# Altium PCB GPSpart.PcbDoc
Units mm, origin at the board's own origin, x right, y up, seen from the top; angles counter-clockwise.
Board outline 40.25 x 18.25 mm, 2 copper layers (Top Layer, Bottom Layer), stack 1.571 mm thick; 14 components, 10 nets, 53 pads, 39 vias.
Unrouted connection lines stored in the file: 15.
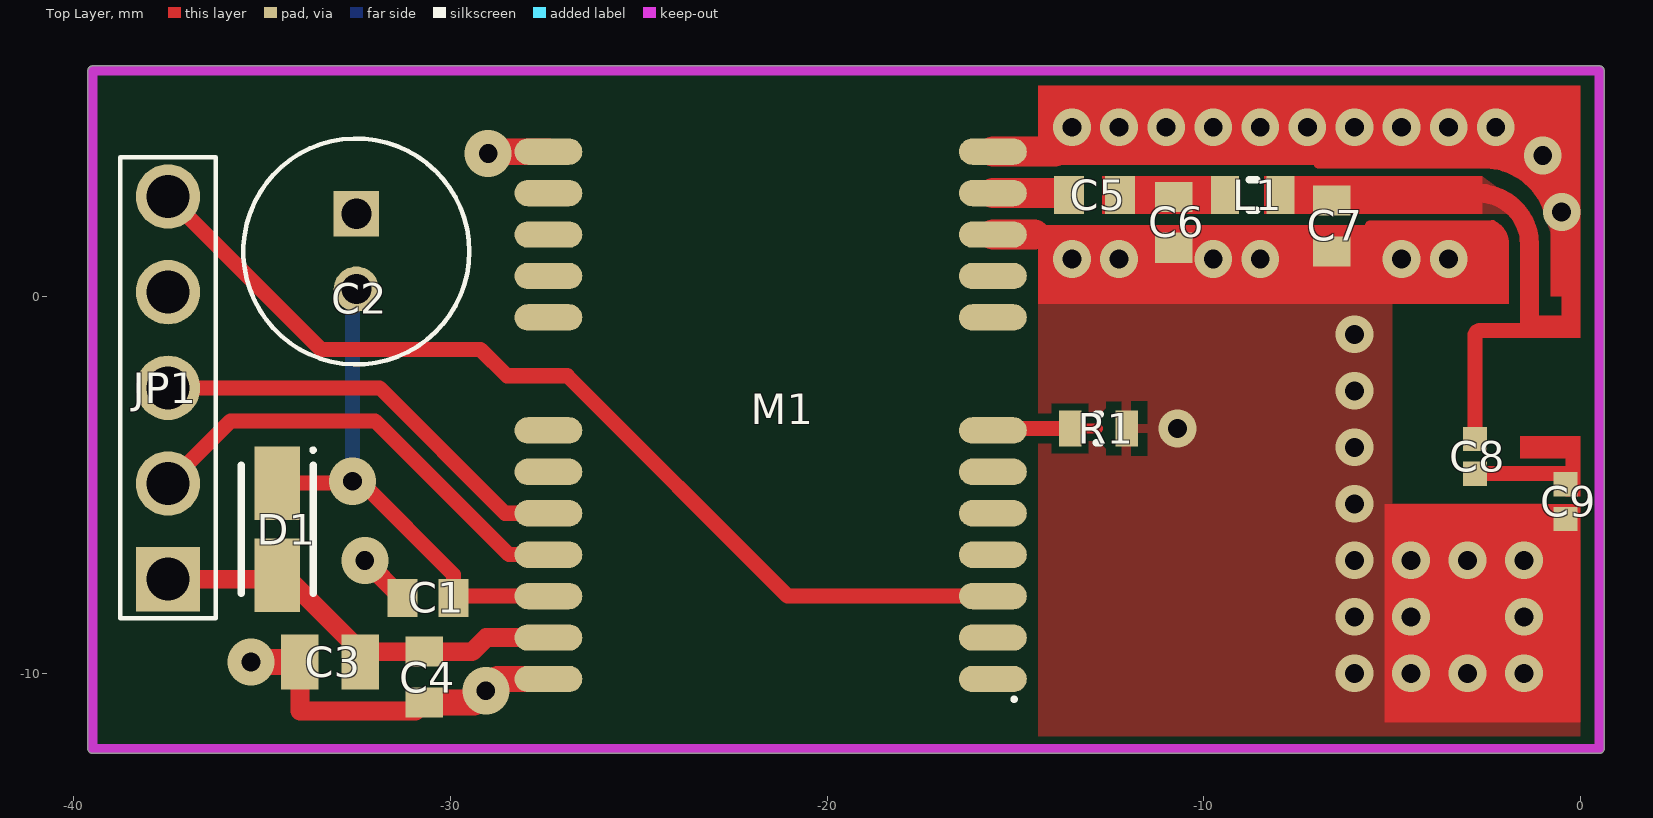
[diagram p0: Top Layer view]
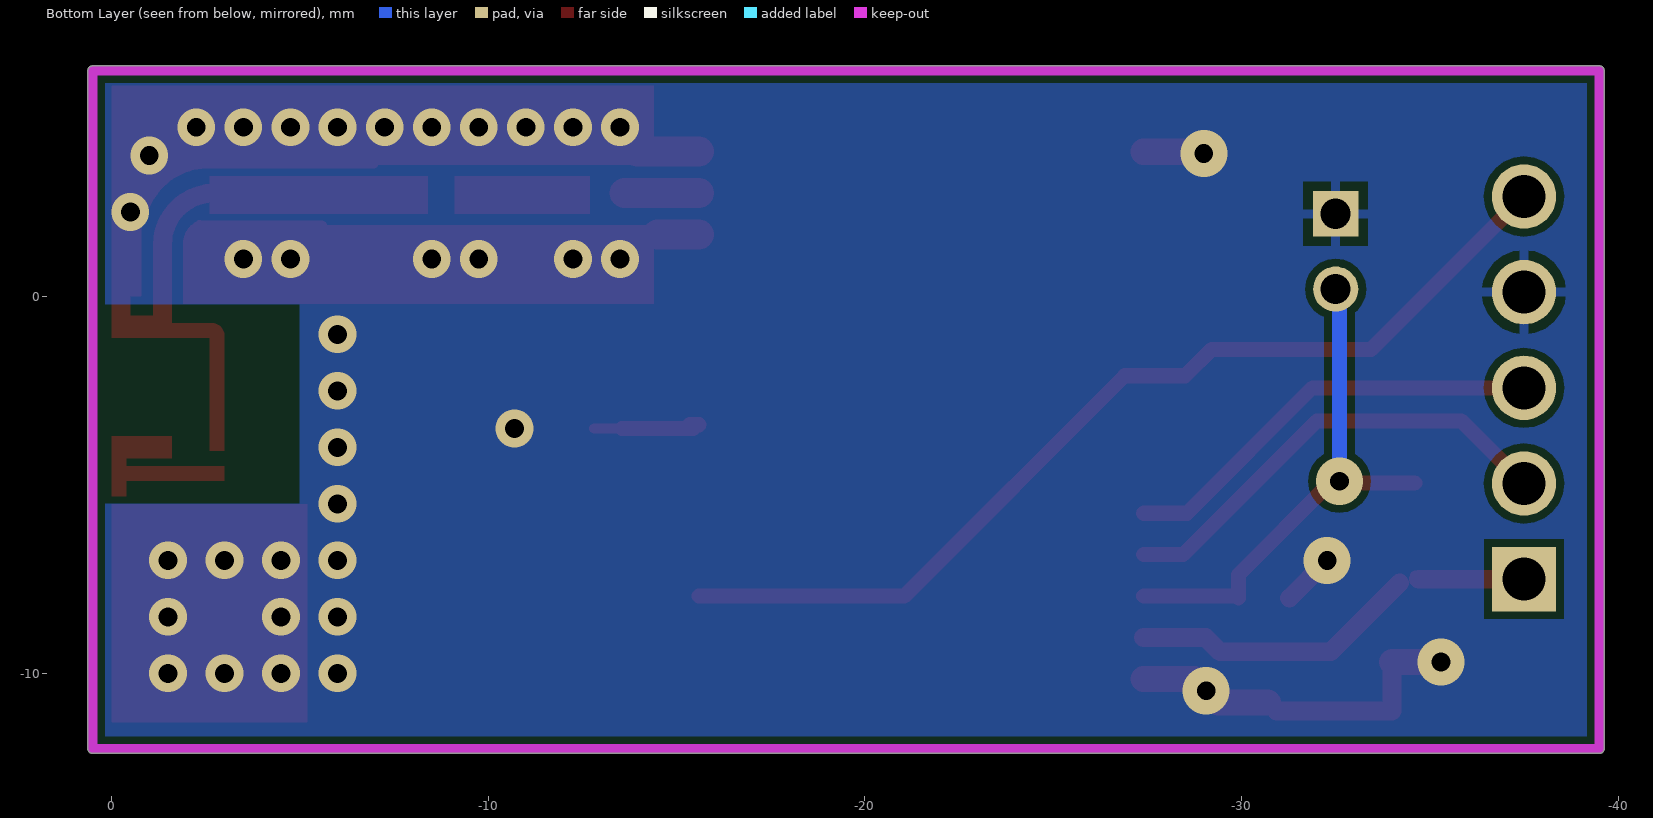
[diagram p1: Bottom Layer view, seen from below]

## Layer stack, top to bottom
Top Solder: solder mask 0.0102, Solder Resist, Dk 3.5
Top Layer: signal copper 0.0356
Dielectric 1: dielectric 1.5, FR-4, Dk 4.8
Bottom Layer: signal copper 0.0356
Bottom Solder: solder mask 0.0102, Solder Resist, Dk 3.5

## Board outline
-39.627,-12 ccw(c-39.5,-12) -39.5,-12.127 0.5,-12.127 ccw(c0.5,-12) 0.627,-12 0.627,6 ccw(c0.5,6) 0.5,6.127 -39.5,6.127 ccw(c-39.5,6) -39.627,6

## Design rules (kind name [scope] priority, off if disabled: settings)
Clearance [All] p1: gap=0.2 ignorepadtopadclearanceinfootprint=FALSE
PolygonConnect PolygonConnect_1 [IsVia vs IsNamedPolygon('JP21B') Or  IsNamedPolygon('JP21B') Or  IsNamedPolygon('JP21B')] p1: connectstyle=Direct reliefconductorwidth=0.254 reliefentries=4 polygonreliefangle="90 Angle" airgapwidth=0.254
PolygonConnect [All] p2: connectstyle=Relief reliefconductorwidth=0.254 reliefentries=4 polygonreliefangle="90 Angle" airgapwidth=0.254
RoutingVias [All] p1: holewidth=0.711 width=1.27 viastyle="Through Hole" minholewidth=0.711 minwidth=1.27 maxholewidth=0.711 maxwidth=1.27
SolderMaskExpansion [All] p1: expansion=0.102
Width [All] p1: maxlimit=4 minlimit=0.2 preferedwidth=0.3
30 further rules are at their usual default settings.

## Components (designator, comment, footprint, x,y, rotation, side; value= is the part's Value field where it differs from the comment)
C1 "100n" CAPC1608X08N -30.6,-8 r180 top
C2 "1000u 6V" CAPPRD200W50D600H1250 -32.5,1.2 r270 top
C3 "10u" CAPC2012X11N -33.2,-9.7 r180 top
C4 "100n" CAPC1608X08N -30.7,-10.1 r270 top
C5 "27p" CAPC1608X08N -12.9,2.7 r0 top
C6 "nc" CAPC1608X08N -10.8,1.975 r270 top
C7 "2p7" CAPC1608X08N -6.6,1.875 r270 top
C8 "1p" CAPC1005X06N -2.8,-4.24 r270 top
C9 "4p7" CAPC1005X06N -0.4,-5.44 r90 top
D1 "BAT54WS" DIOM3216X18N -34.6,-6.175 r270 top
JP1 "Header 5" HDRV5W70P254_5X1_1143X254H754 -37.5,-7.5 r90 top
L1 "0R" INDC1608X10N -8.7,2.7 r0 top
M1 "SIM28" LGA24_GNSS -21.5,-3 r180 top locked
R1 "nc" RESC1608X06N -12.8,-3.5 r0 top

## Footprints (in the part's own frame and the unit in brackets; to place one, negate y for a bottom-side part, rotate by r counter-clockwise, add the part's x,y. Pads: shape width x height; smd on the part's side, far side on the other; paste and mask are expansions set on the pad)
CAPC1005X06N [mm] "Chip Capacitor, 2-Leads, Body 1,00x0,50mm, IPC Medium Density"
  rect 0.64x0.64 smd: 1(-0.46,0) 2(0.46,0)
  body extent -0.55,-0.3 0.55,0.3, height 0.6
CAPC1608X08N [mm] "Chip Capacitor, 2-Leads, Body 1,60x0,80mm, IPC Medium Density"
  rect 0.8x1 smd: 1(-0.675,0) 2(0.675,0)
  body extent -0.87,-0.48 0.87,0.47, height 0.85
CAPC2012X11N [mm] "Chip Capacitor, 2-Leads, Body 2,00x1,25mm, IPC Medium Density"
  rect 1x1.45 smd: 1(-0.8,0) 2(0.8,0)
  body extent -1.1,-0.72 1.1,0.72, height 1.1
CAPPRD200W50D600H1250 [mm] "Capacitor, Polarized, Radial (Electrolytic); 2.00 mm C X 6.00 mm Dia X 12.50 mm H body"
  rect 1.2x1.2 hole 0.8 paste-1.2: 1(-1,0)
  round 1.2 hole 0.8 paste-1.2: 2(1,0)
  silkscreen extent -3,-3 3,3, body extent -3,-3 3.01,3, height 12.51
DIOM3216X18N [mm] "Molded Diode, 2-Leads, Body 3,20x1,60mm, IPC Medium Density"
  rect 1.95x1.2 smd: A(1.225,0) K(-1.225,0)
  silkscreen extent -2.15,-0.95 1.7,1, body extent -1.7,-0.9 1.7,0.9, height 1.8
HDRV5W70P254_5X1_1143X254H754 [mm] "Header, Vertical, 2.54 mm pitch; 0.70 mm lead width, 5 pins, 1 row, 5 pins per row, 11.43 mm L X 2.54 mm W X 7.54 mm H body"
  rect 1.71x1.71 hole 1.14 paste-1.71: 1(0,0)
  round 1.71 hole 1.14 paste-1.71: 2(2.54,0) 3(5.08,0) 4(7.62,0) 5(10.16,0)
  silkscreen extent -1.04,-1.27 11.2,1.27, body extent -0.64,-1.27 10.79,1.27, height 7.54
INDC1608X10N [mm] "Chip Inductor, 2-Leads, Body 1,60x0,80mm, IPC Medium Density"
  rect 0.74x1.02 smd: 1(-0.735,0) 2(0.735,0)
  silkscreen extent -0.1,-0.41 0.1,0.41, body extent -0.9,-0.5 0.9,0.5, height 1
LGA24_GNSS [mm]
  oval 1.8x0.7 smd: 1(-5.9,7.15) 2(-5.9,6.05) 3(-5.9,4.95) 4(-5.9,3.85) 5(-5.9,2.75) 6(-5.9,1.65) 7(-5.9,0.55) 8(-5.9,-2.45) 9(-5.9,-3.55) 10(-5.9,-4.65) 11(-5.9,-5.75) 12(-5.9,-6.85) 13(5.9,-6.85) 14(5.9,-5.75) 15(5.9,-4.65) 16(5.9,-3.55) 17(5.9,-2.45) 18(5.9,0.55) 19(5.9,1.65) 20(5.9,2.75) 21(5.9,3.85) 22(5.9,4.95) 23(5.9,6.05) 24(5.9,7.15)
  silkscreen extent -6.51,7.64 -6.41,7.74, body extent -6.2,-7.7 6.2,8.1, height 3.4
RESC1608X06N [mm] "Chip Resistor, 2-Leads, Body 1,60x0,82mm, IPC Medium Density"
  rect 0.6x0.95 smd: 1(-0.75,0) 2(0.75,0)
  silkscreen extent -0.05,-0.38 0.05,0.38, body extent -0.85,-0.48 0.85,0.48, height 0.6

## Part data
C1 C3 C4 C5 C6 C7 C8 C9: library part CAPN
C2: library part C-EL-DIP
D1: library part "DIODE SCHOTTKY", Text Field1=30, Text Field2=20
JP1: "Header, 5-Pin", LatestRevisionDate=17-Jul-2002, LatestRevisionNote="Re-released for DXP Platform.", Publisher="Altium Limited"
L1: library part L
R1: library part RES

## Via types
v1: diameter 1, hole 0.5, Top Layer to Bottom Layer, 34 vias
v2: diameter 1.25, hole 0.5, Top Layer to Bottom Layer, 5 vias

## Nets (pads, with @x,y where several pads share a name; then routed paths per layer and width w, separated by ;. In a path a pad name is that pad's centre, name@x,y a point inside that pad or via, vN(x,y) a via of type N, cw(c..) or ccw(c..) an arc to the next point about the centre after c; other vN are vias at no path point)
1PPS: JP1.5 M1.3 | length 26.3
  Top Layer w0.4: JP1.5 -33.44,-1.4 -29.2,-1.4 -28.5,-2.1 -26.9,-2.1 -21.05,-7.95 M1.3
GND: C1.2 C2.1 C3.2 C4.2 C6.2 C7.1 C7.2 C8.1 C9.1 JP1.4 L1.2 M1.10 M1.12 M1.13 M1.24 R1.2 | length 28.4
  Top Layer w0.25: -6.966,3.534 -2.5,3.534 ; -5.6,1.9 -2.337,1.9 ; -2.5,3.53 cw(c-2.577,1.724) v1@-0.901,2.401 ; -2.337,1.905 cw(c-2.55,1.425) -2.035,1.322
  Top Layer w0.3: C4.2@-30.925,-11 C4.2 ; v2(-29,3.8) v2@-28.95,3.85 ; -2.85,-1.1 cw(c-2.651,-1.049) -2.732,-0.86
  Top Layer w0.5: C3.2 -34,-11 C4.2@-30.925,-11 ; v2(-32.275,-7) C1.2 ; M1.13@-27.45,3.9 M1.13 ; -2.725,2.75 cw(c-2.725,1.375) -1.35,1.375
  Top Layer w0.7: v2(-35.3,-9.7) C3.2 ; C4.2 -29.375,-10.775 -28.75,-10.15 M1.24 ; v2@-28.95,3.85 M1.13
  Top Layer w0.8: M1.10 -14.5,1.65 ; M1.12 -13.95,3.85
  other v1: -6,-10 -4.5,-10 -3,-10 -1.5,-10 -6,-8.5 -4.5,-8.5 -1.5,-8.5 -6,-7 -4.5,-7 -3,-7 -1.5,-7 -6,-5.5 -6,-4 -10.7,-3.5 -6,-2.5 -6,-1 -13.5,1 -12.25,1 -9.75,1 -8.5,1 -4.75,1 -3.5,1 -0.5,2.25 -1,3.75 -13.5,4.5 -12.25,4.5 -11,4.5 -9.75,4.5 -8.5,4.5 -7.25,4.5 -6,4.5 -4.75,4.5 -3.5,4.5 -2.25,4.5
  other v2: -29.062,-10.462
NetC1_1: C1.1 C2.2 D1.K M1.22 | length 13.6
  Top Layer w0.254: C1.1 C1.1@-29.875,-7.95
  Top Layer w0.4: D1.K -32.35,-4.95 -29.925,-7.375 C1.1 ; C1.1@-29.875,-7.95 M1.22
  Bottom Layer w0.254: C2.2@-32.6,-0.3 C2.2@-32.5,-0.2
  Bottom Layer w0.4: v2(-32.6,-4.9) C2.2@-32.6,-0.3
NetC5_1: C5.1 M1.11 | length 2
  Top Layer w0.254: C5.1@-13.625,2.75 C5.1
  Top Layer w0.8: M1.11 C5.1@-13.625,2.75
NetC5_2: C5.2 C6.1 L1.1
NetC8_2: C8.2 C9.2
NetM1_7: M1.7 R1.1 | length 3
  Top Layer w0.254: M1.7@-15.45,-3.5 M1.7@-15.35,-3.4 ; R1.1 -12.8,-3.5
  Top Layer w0.4: M1.7@-15.6,-3.4 M1.7@-15.35,-3.4 ; M1.7@-15.45,-3.5 R1.1
RXD: JP1.2 M1.21 | length 12.3
  Top Layer w0.4: JP1.2 -35.84,-3.3 -32,-3.3 -28.45,-6.85 M1.21
TXD: JP1.3 M1.20 | length 11.5
  Top Layer w0.4: JP1.3 -31.88,-2.42 -28.55,-5.75 M1.20
VCC: C3.1 C4.1 D1.A JP1.1 M1.23 | length 10.7
  Top Layer w0.254: D1.A@-34.7,-7.5 D1.A
  Top Layer w0.5: JP1.1 D1.A@-34.7,-7.5 ; D1.A@-34.2,-7.6 -32.375,-9.425 C4.1 -29.425,-9.425 -29.05,-9.05 M1.23
pads on no net: M1.1 M1.2 M1.4 M1.5 M1.6 M1.8 M1.9 M1.14 M1.15 M1.16 M1.17 M1.18 M1.19

## Polygon pours and split planes (outlines as drawn)
GND on Top Layer "JP21B" (solid, remove dead copper, pour order 4): -5,-5.5 -5,0.004 -14.4,-0.005 -14.4,-12 0,-12 0,-5.5
GND on Top Layer "JP21B" (solid, pour order 16): -2.7,2.2 -2.3,2.2 -1.9,2.2 -2.4,2.7 -2.7,2.7
no net on Top Layer "JP21B" (solid, remove dead copper, pour order 14): -2.9,2.2
GND on Top Layer "JP21B" (solid, remove dead copper, pour order 12): -2.8,3.2 -2.609,3.2 -1.854,2.646 -2.1,2.4
GND on Top Layer "JP21B" (solid, remove dead copper, pour order 2): -1.252,3.052 -0.7,2.5 -0.7,1.403
GND on Bottom Layer "JP21B" (solid, remove dead copper, pour order 10): -5,-5.5 0.5,-5.5 0.5,-12 -39.5,-12 -39.5,6 0.5,6 0.5,-0.2 -5,-0.2

## Keep-outs
Keep-Out Layer:
  lines w0.254: -39.5,-12 -39.5,6 0.5,6 0.5,-12 -39.5,-12

## Other copper
Top Layer:
  rectangle net GND: -14.2,1.2 -4.9,1.9
  rectangle net NetC8_2: -0.4,-5.3 0,-4.9
  rectangle net GND: -5.2,-11.3 0,-5.5
  rectangle net NetC8_2: -3,-4.9 0,-4.5
  rectangle net NetC8_2: -0.4,-4.5 0,-4.2
  rectangle net GND: -3,-4.1 -2.6,-1
  rectangle net NetC8_2: -1.6,-4.3 0,-3.7
  rectangle net GND: -14.4,3.5 -1.8,5.6
  rectangle net GND: -1.9,3.3 -1.4,5.6
  rectangle net GND: -1.5,3.052 -1,5.6
  rectangle net GND: -1.252,2.776 -0.9,5.6
  rectangle net GND: -1,2.5 -0.5,5.6
  rectangle net GND: -5,1.4 -2.1,1.9
  rectangle net GND: -14.4,-0.2 -1.9,1.5
  rectangle net GND: -6.1,2.2 -2.6,3.2
  rectangle net GND: -0.8,0 0,5.6
  rectangle net GND: -2.732,-1.1 -1.5,-0.7
  rectangle net GND: -0.5,-0.6 0,0.1
  rectangle net GND: -1.6,-1.1 0,-0.5
  rectangle net GND: -1.6,-0.7 -1.1,1.375
  rectangle net GND: -8.4,2.2 -6,3.2
  rectangle net NetC5_2: -12.7,2.2 -9.1,3.2

## Silkscreen, mask and mechanical layers (free items; w line width, h text height)
Top Paste:
  rectangle: -1.5,-4.2 -0.1,-3.8
  rectangle: -1.5,-1 -0.1,-0.6
Top Solder:
  rectangle: -1.6,-4.3 0,-3.7
  rectangle: -1.6,-1.1 0,-0.5
Mechanical 12:
  lines w0.1: -5,-12 -5,6 ; -5,-5.5 0,-5.5 0,0 ; -5,0 0.5,0